# EAGLE board SETHU CIRCUIT(3) (EAGLE 5.06)
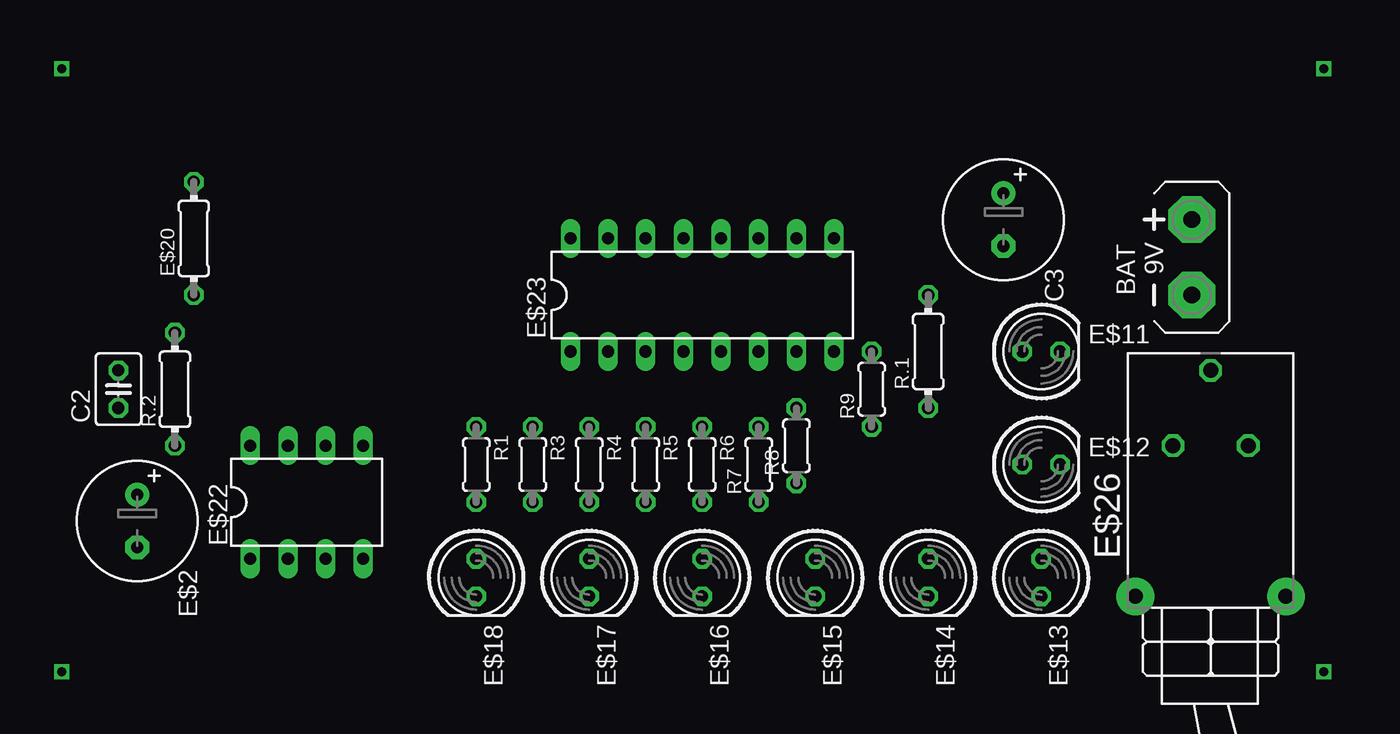
[diagram p0: board, top side]
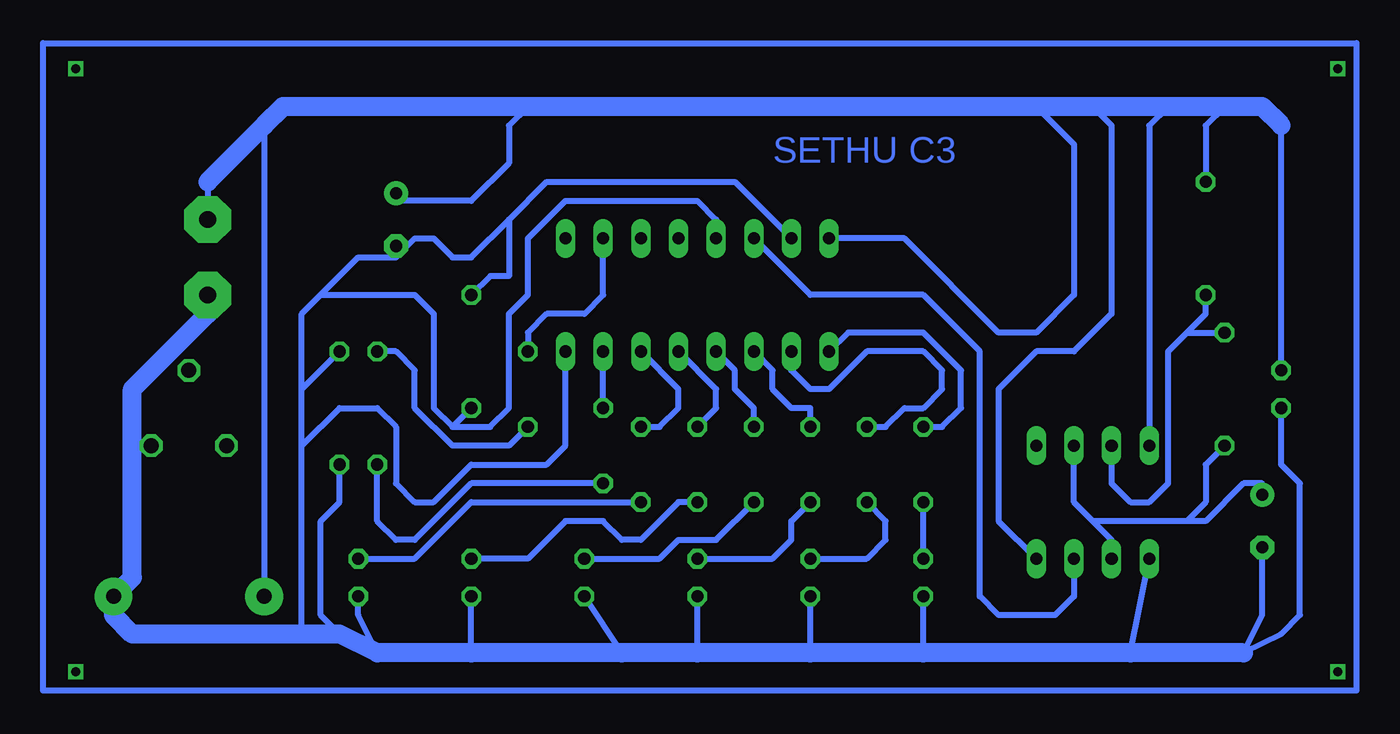
[diagram p1: board, bottom side, seen from below]

No outline drawn. Coordinates in mm, seen from the top.
Copper layers (1*16): Top 0.035mm / dielectric 1.5mm / Bottom 0.035mm
Design rules "default": minimum track width 10mil, minimum drill 24mil, track to track 8mil, track to pad 8mil, pad to pad 8mil, via to via 8mil, smd to smd 8mil, copper to edge 40mil, drill to drill 8mil, minimum pad ring 10mil, minimum via ring 8mil, stop-mask expansion 4mil, vias tented up to drill 0mil, thermal gap 10mil

## Footprints (pad centres in the part's own frame; a part is rotated, then mirrored left to right if it is on the bottom)
AB9V = drill 1.118 pad 3.15 octagon: + 0,2.54; - 0,-2.54
C025-030X050 = drill 0.813 octagon: 1 -1.27,0; 2 1.27,0
E3,5-8 = drill 0.813 pad 1.6 round: + -1.778,0 | drill 0.813 pad 1.6 octagon: - 1.778,0
LED5MM = drill 0.813 octagon: A -1.27,0; K 1.27,0
0204/7 = drill 0.813 octagon: 1 -3.81,0; 2 3.81,0
DIL08 = drill 0.813 long: 1 -3.81,-3.81; 2 -1.27,-3.81; 3 1.27,-3.81; 4 3.81,-3.81; 5 3.81,3.81; 6 1.27,3.81; 7 -1.27,3.81; 8 -3.81,3.81
DIL16 = drill 0.813 long: 1 -8.89,-3.81; 2 -6.35,-3.81; 3 -3.81,-3.81; 4 -1.27,-3.81; 5 1.27,-3.81; 6 3.81,-3.81; 7 6.35,-3.81; 8 8.89,-3.81; 9 8.89,3.81; 10 6.35,3.81; 11 3.81,3.81; 12 1.27,3.81; 13 -1.27,3.81; 14 -3.81,3.81; 15 -6.35,3.81; 16 -8.89,3.81
316-917 = drill 1.016 octagon: 1 10.16,2.54; 2 15.24,0; 3 10.16,-2.54 | drill 1.016 pad 2.54 round: B 0,-5.08; B1 0,5.08
0204/5 = drill 0.813 octagon: 1 -2.54,0; 2 2.54,0

## Placement (x,y rotation side)
BAT  [AB9V]  82.55,29.21 0 top
C2  0.1uF  [C025-030X050]  10.16,20.32 90 top
C3  1uF  [E3,5-8]  69.85,31.75 270 top
E$2  1uF  [E3,5-8]  11.43,11.43 270 top
E$11  [LED5MM]  72.39,22.86 0 top
E$12  [LED5MM]  72.39,15.24 0 top
E$13  [LED5MM]  72.39,7.62 270 top
E$14  [LED5MM]  64.77,7.62 270 top
E$15  [LED5MM]  57.15,7.62 270 top
E$16  [LED5MM]  49.53,7.62 270 top
E$17  [LED5MM]  41.91,7.62 270 top
E$18  [LED5MM]  34.29,7.62 270 top
E$20  2k2  [0204/7]  15.24,30.48 90 top
E$22  555  [DIL08]  22.86,12.7 0 top
E$23  40174  [DIL16]  49.53,26.67 0 top
E$26  [316-917]  83.82,6.35 90 top
R1  [0204/5]  34.29,15.24 270 top
R3  [0204/5]  38.1,15.24 270 top
R4  [0204/5]  41.91,15.24 270 top
R5  [0204/5]  45.72,15.24 270 top
R6  [0204/5]  49.53,15.24 270 top
R7  [0204/5]  53.34,15.24 90 top
R8  [0204/5]  55.88,16.51 90 top
R9  [0204/5]  60.96,20.32 90 top
R.1  23k  [0204/7]  64.77,22.86 90 top
R.2  180k  [0204/7]  13.97,20.32 90 top

## Library data of the parts
BAT = battery
C2 C3 E$2 E$20 R1 R3-R9 R.1 R.2 = resistor
E$11-E$18 = led
E$22 E$23 = ic-package
E$26 = switch

## Nets
C1: BAT.- C2.1 E$11.K E$12.K E$13.K E$14.K E$15.K E$16.K E$17.K E$18.K E$22.1 E$23.8 E$23.13 E$23.15 E$26.B R.1.1 R.1.2
IC1: E$23.10 R9.2
R.3: E$20.1 E$22.7 R.2.2
S$3: E$22.3 E$23.14
S$4: E$18.A R1.2
S$5: E$22.2 E$22.6 R.2.1
S$6: BAT.+ C2.2 E$20.2 E$22.4 E$22.8 E$23.16 E$26.B1
S$8: E$17.A R3.2
S$9: E$16.A R4.2
S$10: E$15.A R5.2
S$11: E$14.A R6.2
S$12: E$23.1 R1.1
S$13: E$23.2 R3.1
S$14: E$23.3 R4.1
S$15: E$23.4 R5.1
S$16: E$23.5 R6.1
S$17: E$13.A R7.1
S$18: E$23.6 R7.2
S$19: E$23.7 R8.2
S$20: E$12.A R8.1
S$21: E$11.A R9.1

## Tracks (layer width: path | path; a pad name or v marks a point on that pad's centre or on a via)
C1
  Bottom 0.406: E$23.15 46.99,34.29 59.69,34.29 62.23,31.75 | 62.23,31.75 62.23,27.94 63.5,27.94 R.1.2 | 62.23,31.75 64.77,29.21 66.04,29.21 67.31,30.48 68.58,30.48 69.85,29.21 72.39,29.21 74.93,26.67 | E$23.13 48.26,31.75 49.53,33.02 58.42,33.02 60.96,30.48 60.96,26.67 62.23,25.4 62.23,19.05 63.5,17.78 66.04,17.78 | E$23.8 58.42,16.51 59.69,15.24 64.77,15.24 67.31,12.7 68.58,12.7 69.85,13.97 69.85,17.78 71.12,19.05 73.66,19.05 76.2,16.51 | 66.04,17.78 67.31,19.05 67.31,25.4 68.58,26.67 74.93,26.67 | 74.93,26.67 76.2,25.4 76.2,20.32 | E$12.K 73.66,12.7 74.93,11.43 74.93,5.08 73.66,3.81 | 76.2,20.32 E$11.K | 76.2,16.51 76.2,20.32 | 76.2,3.81 76.2,16.51 | E$13.K 72.39,5.08 71.12,2.54 | 64.77,2.54 E$14.K | 54.61,2.54 E$15.K | 49.53,2.54 E$16.K | 41.91,2.54 E$17.K | C2.1 10.16,15.24 8.89,13.97 8.89,5.08 10.16,3.81 12.7,2.54 11.43,5.08 11.43,10.16 | 34.29,2.54 E$18.K | 20.32,2.54 E$22.1 | 66.04,17.78 R.1.1
  Bottom 1.27: BAT.- 82.55,25.4 87.63,20.32 87.63,7.62 E$26.B 88.9,5.08 87.63,3.81 76.2,3.81 73.66,3.81 71.12,2.54 64.77,2.54 54.61,2.54 49.53,2.54 41.91,2.54 34.29,2.54 20.32,2.54 12.7,2.54
IC1
  Bottom 0.406: E$23.10 55.88,26.67 57.15,25.4 59.69,25.4 60.96,24.13 R9.2
R.3
  Bottom 0.406: E$22.7 21.59,13.97 20.32,12.7 19.05,12.7 17.78,13.97 17.78,22.86 16.51,24.13 | 16.51,24.13 R.2.2 | 16.51,24.13 15.24,25.4 E$20.1
S$1
  Bottom 0.406: 5.08,0 93.65,0 93.65,43.65 5.08,43.65 5.08,0
S$2  (via drill 0.6)
  other vias: 6.35,41.91
S$3
  Bottom 0.406: E$22.3 24.13,6.35 25.4,5.08 29.21,5.08 30.48,6.35 30.48,22.86 34.29,26.67 41.91,26.67 E$23.14
S$4
  Bottom 0.406: E$18.A R1.2
S$5
  Bottom 0.406: R.2.1 15.24,15.24 15.24,12.7 16.51,11.43 | E$22.6 24.13,12.7 22.86,11.43 | E$22.2 21.59,10.16 22.86,11.43 | 16.51,11.43 15.24,11.43 12.7,13.97 11.43,13.97 | 16.51,11.43 22.86,11.43
S$6
  Bottom 0.406: E$23.16 35.56,30.48 29.21,24.13 26.67,24.13 24.13,26.67 24.13,36.83 26.67,39.37 | E$22.4 29.21,11.43 29.21,20.32 26.67,22.86 24.13,22.86 21.59,25.4 21.59,38.1 22.86,39.37 | 69.85,33.02 64.77,33.02 62.23,35.56 62.23,38.1 60.96,39.37 | E$22.8 19.05,38.1 17.78,39.37 | E$20.2 15.24,38.1 13.97,39.37 | C2.2 10.16,38.1 | 82.55,34.29 BAT.+ | 78.74,38.1 E$26.B1
  Bottom 1.27: 10.16,38.1 11.43,39.37 13.97,39.37 17.78,39.37 22.86,39.37 26.67,39.37 60.96,39.37 77.47,39.37 78.74,38.1 82.55,34.29
S$7  (via drill 0.6)
  other vias: 6.35,1.27
S$8
  Bottom 0.406: E$17.A 38.1,8.89 36.83,10.16 36.83,11.43 R3.2
S$9
  Bottom 0.406: E$16.A 44.45,8.89 43.18,10.16 43.18,11.43 R4.2
S$10
  Bottom 0.406: E$15.A 52.07,8.89 50.8,10.16 48.26,10.16 R5.2
S$11
  Bottom 0.406: R6.2 50.8,12.7 53.34,10.16 54.61,10.16 55.88,11.43 58.42,11.43 60.96,8.89 E$14.A
S$12
  Bottom 0.406: R1.1 33.02,17.78 31.75,19.05 31.75,21.59 34.29,24.13 39.37,24.13 E$23.1
S$13
  Bottom 0.406: R3.1 36.83,17.78 35.56,19.05 34.29,19.05 33.02,20.32 33.02,21.59 34.29,22.86 38.1,22.86 40.64,20.32 41.91,20.32 43.18,21.59 E$23.2
S$14
  Bottom 0.406: R4.1 41.91,19.05 43.18,19.05 44.45,20.32 44.45,21.59 E$23.3
S$15
  Bottom 0.406: R5.1 45.72,19.05 46.99,20.32 46.99,21.59 E$23.4
S$16
  Bottom 0.406: R6.1 48.26,19.05 48.26,20.32 E$23.5
S$17
  Bottom 0.406: E$13.A 68.58,8.89 64.77,12.7 R7.1
S$18
  Bottom 0.406: R7.2 52.07,17.78 50.8,19.05 50.8,20.32 E$23.6
S$19
  Bottom 0.406: R8.2 E$23.7
S$20
  Bottom 0.406: R8.1 64.77,13.97 68.58,10.16 69.85,10.16 71.12,11.43 E$12.A
S$21
  Bottom 0.406: E$11.A 69.85,22.86 68.58,21.59 68.58,19.05 66.04,16.51 62.23,16.51 R9.1
S$22  (via drill 0.6)
  other vias: 91.44,1.27
S$23  (via drill 0.6)
  other vias: 91.44,41.91

## Text on the board
Bottom: SETHU C3